# EAGLE board BluetoothMate-Panel v16a (EAGLE 6.5.0), part 1 of 2
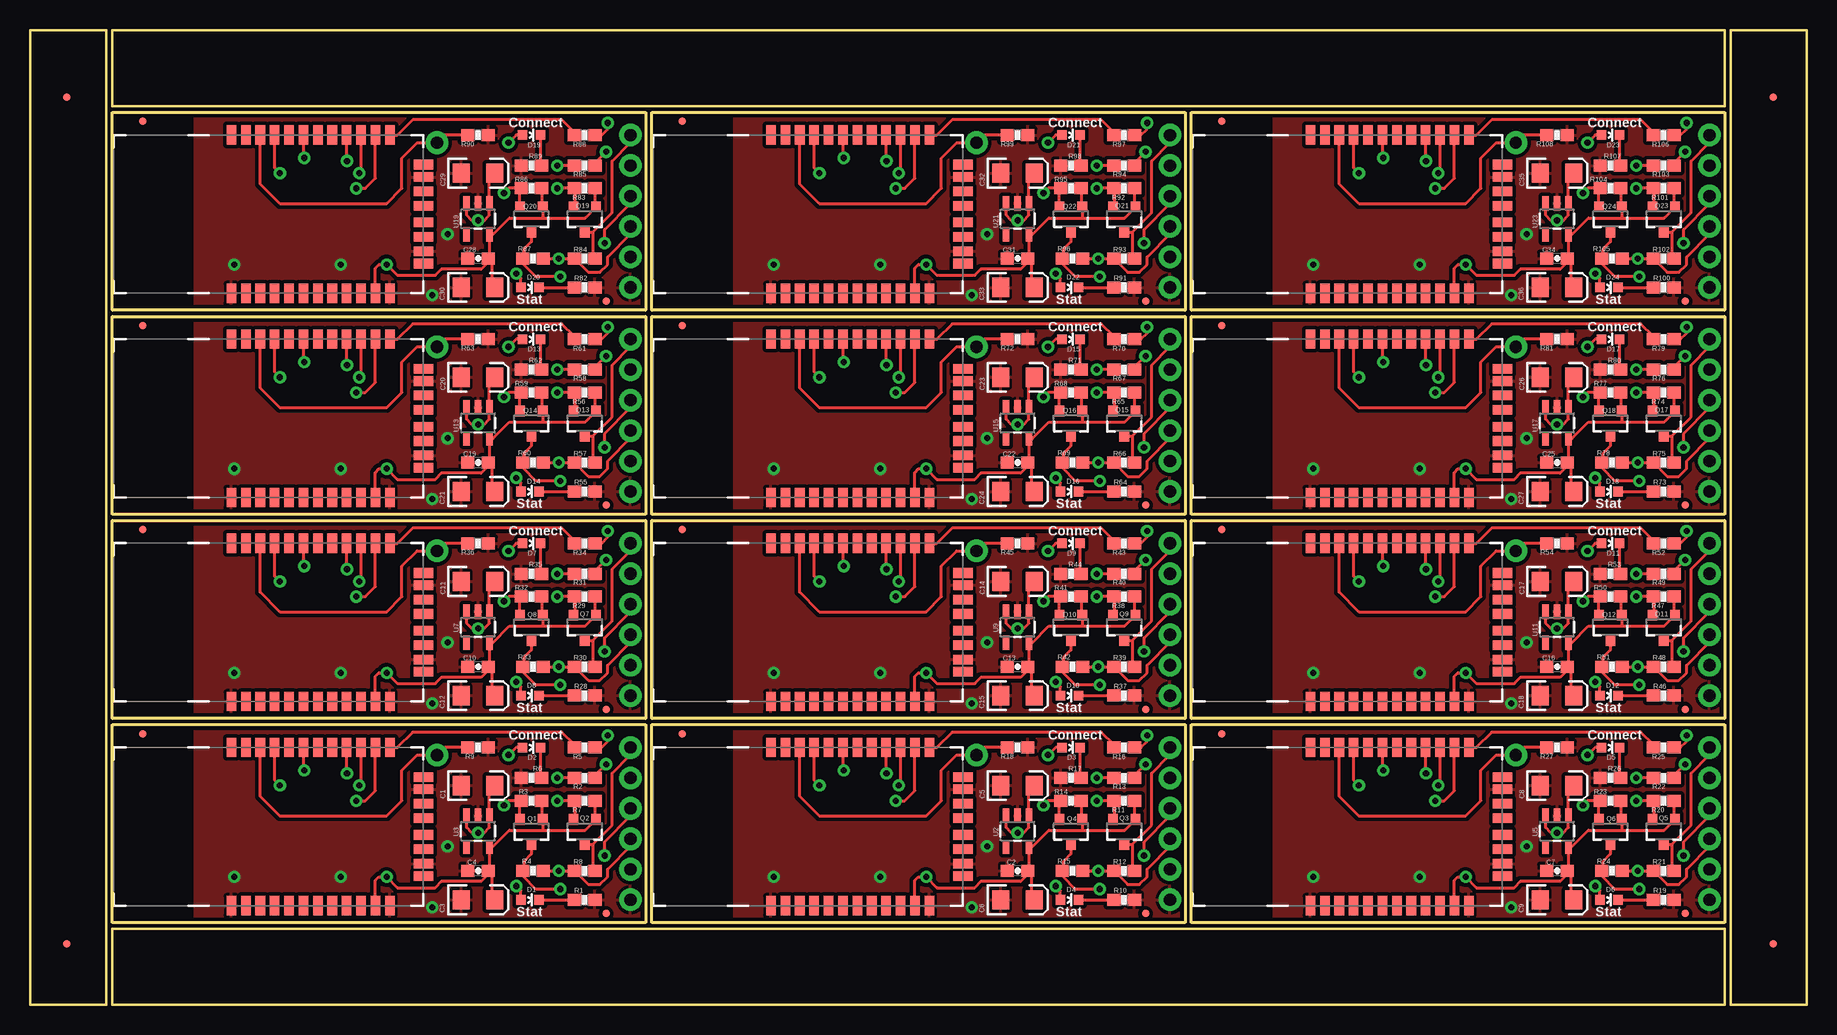
[diagram p0: board, top side]
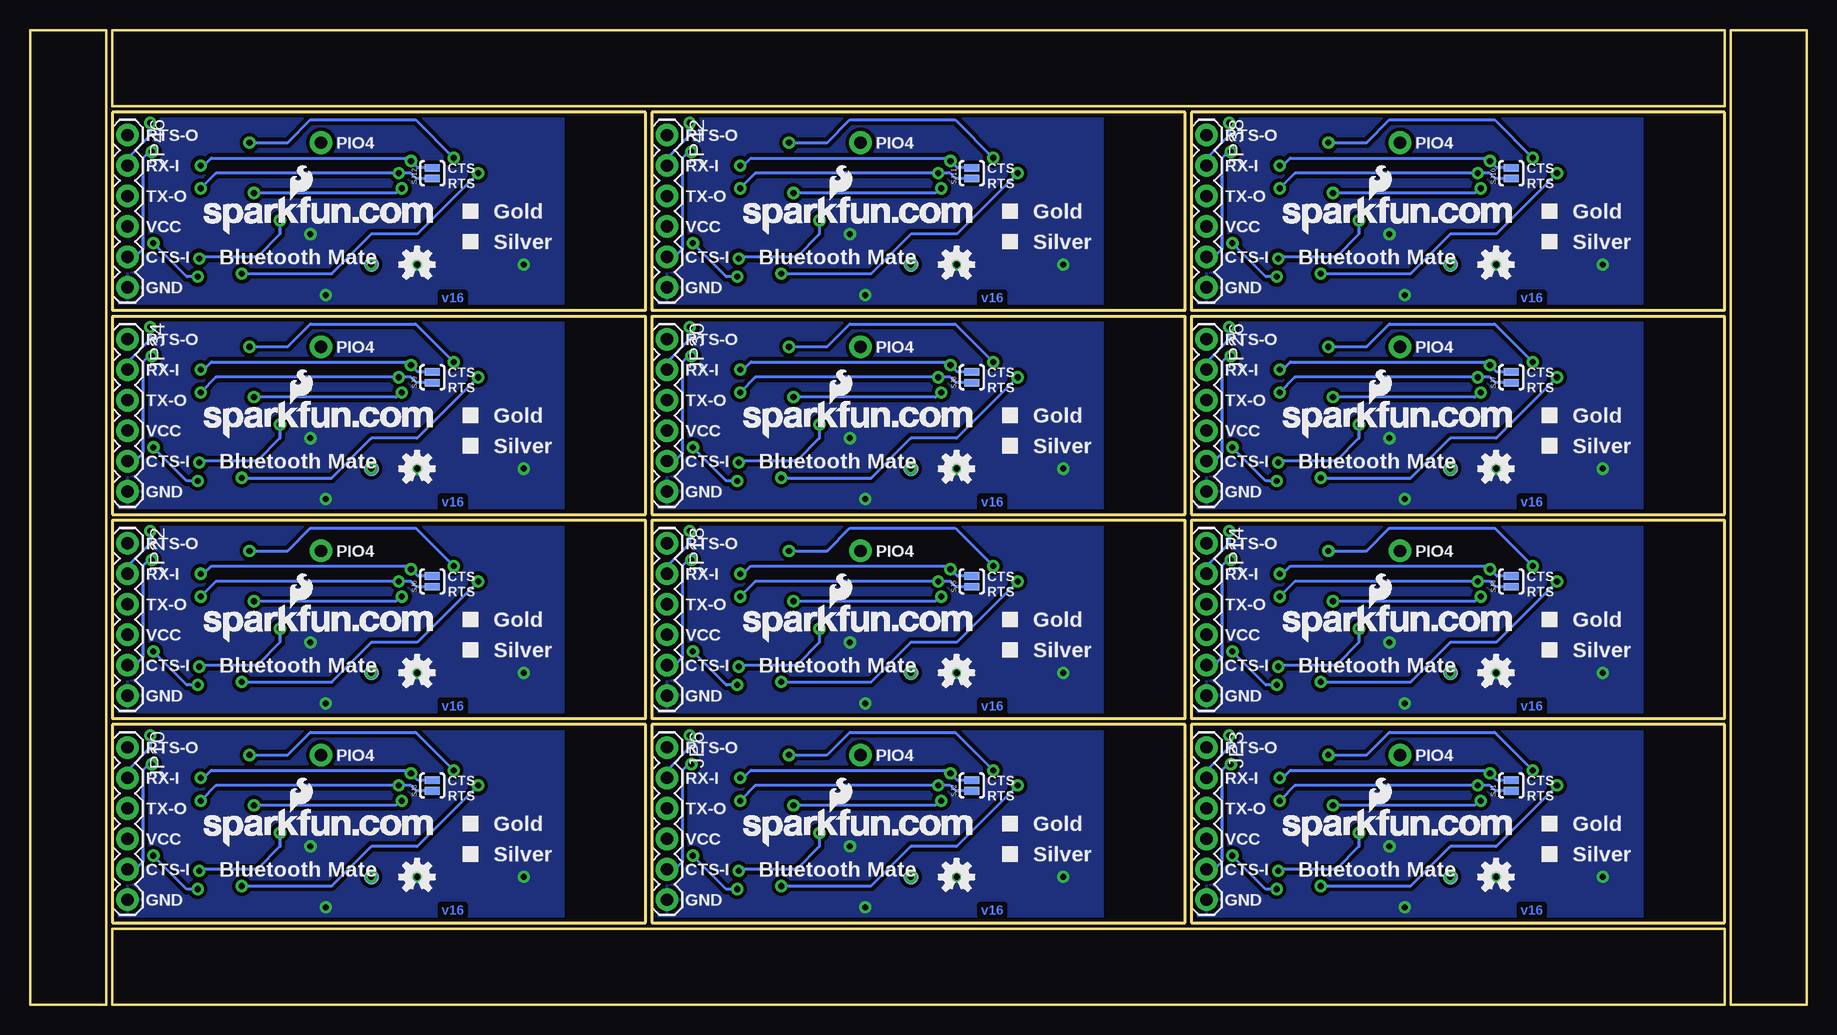
[diagram p1: board, bottom side, seen from below]

Size 148.08 x 81.28 mm. Coordinates in mm from the lower left corner, seen from the top.
Outline: 6.86,6.86 6.86,23.37 51.31,23.37 51.31,6.86 6.86,6.86
Outline: 141.22,6.35 6.86,6.35 6.86,0 141.22,0 141.22,6.35
Outline: 51.82,6.86 51.82,23.37 96.27,23.37 96.27,6.86 51.82,6.86
Outline: 96.77,6.86 96.77,23.37 141.22,23.37 141.22,6.86 96.77,6.86
Outline: 6.86,23.88 6.86,40.39 51.31,40.39 51.31,23.88 6.86,23.88
Outline: 51.82,23.88 51.82,40.39 96.27,40.39 96.27,23.88 51.82,23.88
Outline: 96.77,23.88 96.77,40.39 141.22,40.39 141.22,23.88 96.77,23.88
Outline: 6.86,40.89 6.86,57.4 51.31,57.4 51.31,40.89 6.86,40.89
Outline: 51.82,40.89 51.82,57.4 96.27,57.4 96.27,40.89 51.82,40.89
Outline: 96.77,40.89 96.77,57.4 141.22,57.4 141.22,40.89 96.77,40.89
Outline: 6.86,57.91 6.86,74.42 51.31,74.42 51.31,57.91 6.86,57.91
Outline: 51.82,57.91 51.82,74.42 96.27,74.42 96.27,57.91 51.82,57.91
Outline: 96.77,57.91 96.77,74.42 141.22,74.42 141.22,57.91 96.77,57.91
Outline: 141.22,81.28 6.86,81.28 6.86,74.93 141.22,74.93 141.22,81.28
Outline: 6.35,0 6.35,81.28 0,81.28 0,0 6.35,0
Outline: 148.08,0 148.08,81.28 141.73,81.28 141.73,0 148.08,0
Copper layers (1*16): Top 0.035mm / dielectric 1.5mm / Bottom 0.035mm
Design rules "SparkFun *": minimum track width 8mil, minimum drill 20mil, track to track 8mil, track to pad 8mil, pad to pad 8mil, via to via 8mil, smd to smd 8mil, copper to edge 9mil, drill to drill 8mil, minimum pad ring 12mil, minimum via ring 10mil, stop-mask expansion 4mil, vias tented up to drill 20mil, thermal gap 10mil

## Footprints (pad centres in the part's own frame; a part is rotated, then mirrored left to right if it is on the bottom)
EIA3216 = smd 1.4 x 1.6: A 1.4,0; C -1.4,0
0603-CAP = smd 1.1 x 1: 1 -0.85,0; 2 0.85,0
LED-0603 = smd 0.8 x 0.8: A 0,-0.75; C 0,0.75
MICRO-FIDUCIAL = smd 0.635 x 0.635: 1 0,0
FIDUCIAL-1X2.5 = smd 0.635 x 0.635: 1 0,0
1X01NS = drill 1.016 pad 1.88: 1 0,0
1X06 = drill 1.016 pad 1.88: 1 0,0; 2 2.54,0; 3 5.08,0; 4 7.62,0; 5 10.16,0; 6 12.7,0
SOT23-3 = smd 0.8 x 0.9: 1 -0.95,-1; 2 0.95,-1; 3 0,1.1
0603-RES = smd 1.1 x 1: 1 -0.85,0; 2 0.85,0
SJ_2S-NO = smd 0.635 x 1.27: 1 -0.45,0; 2 0.45,0
PAD.03X.05 = smd 1.27 x 1.27: P$1 0,0
RN41 = smd 0.8 x 1.6: 1 -6.6,-6.6; 2 -5.4,-6.6; 3 -4.2,-6.6; 4 -3,-6.6; 5 -1.8,-6.6; 6 -0.6,-6.6; 7 0.6,-6.6; 8 1.8,-6.6; 9 3,-6.6; 10 4.2,-6.6; 11 5.4,-6.6; 12 6.6,-6.6; 13 6.6,6.6; 14 5.4,6.6; 15 4.2,6.6; 16 3,6.6; 17 1.8,6.6; 18 0.6,6.6; 19 -0.6,6.6; 20 -1.8,6.6; 21 -3,6.6; 22 -4.2,6.6; 23 -5.4,6.6; 24 -6.6,6.6 | smd 1.6 x 0.8: 28 9.4,3.1; 29 9.4,-3.1; 30 9.4,4.122; 31 9.4,1.9; 32 9.4,0.7; 33 9.4,-0.7; 34 9.4,-1.9; 35 9.4,-4.122
SOT23-5 = smd 0.55 x 1.2: 1 -0.95,-1.3; 2 0,-1.3; 3 0.95,-1.3; 4 0.95,1.3; 5 -0.95,1.3

## Placement (x,y rotation side)
C1  10uF  [EIA3216]  37.34,18.29 0 top
C2  1uF  [0603-CAP]  82.3,11.18 180 top
C3  10uF  [EIA3216]  37.34,8.76 0 top
C4  1uF  [0603-CAP]  37.34,11.18 180 top
C5  10uF  [EIA3216]  82.3,18.29 0 top
C6  10uF  [EIA3216]  82.3,8.76 0 top
C7  1uF  [0603-CAP]  127.25,11.18 180 top
C8  10uF  [EIA3216]  127.25,18.29 0 top
C9  10uF  [EIA3216]  127.25,8.76 0 top
C10  1uF  [0603-CAP]  37.34,28.19 180 top
C11  10uF  [EIA3216]  37.34,35.31 0 top
C12  10uF  [EIA3216]  37.34,25.78 0 top
C13  1uF  [0603-CAP]  82.3,28.19 180 top
C14  10uF  [EIA3216]  82.3,35.31 0 top
C15  10uF  [EIA3216]  82.3,25.78 0 top
C16  1uF  [0603-CAP]  127.25,28.19 180 top
C17  10uF  [EIA3216]  127.25,35.31 0 top
C18  10uF  [EIA3216]  127.25,25.78 0 top
C19  1uF  [0603-CAP]  37.34,45.21 180 top
C20  10uF  [EIA3216]  37.34,52.32 0 top
C21  10uF  [EIA3216]  37.34,42.8 0 top
C22  1uF  [0603-CAP]  82.3,45.21 180 top
C23  10uF  [EIA3216]  82.3,52.32 0 top
C24  10uF  [EIA3216]  82.3,42.8 0 top
C25  1uF  [0603-CAP]  127.25,45.21 180 top
C26  10uF  [EIA3216]  127.25,52.32 0 top
C27  10uF  [EIA3216]  127.25,42.8 0 top
C28  1uF  [0603-CAP]  37.34,62.23 180 top
C29  10uF  [EIA3216]  37.34,69.34 0 top
C30  10uF  [EIA3216]  37.34,59.82 0 top
C31  1uF  [0603-CAP]  82.3,62.23 180 top
C32  10uF  [EIA3216]  82.3,69.34 0 top
C33  10uF  [EIA3216]  82.3,59.82 0 top
C34  1uF  [0603-CAP]  127.25,62.23 180 top
C35  10uF  [EIA3216]  127.25,69.34 0 top
C36  10uF  [EIA3216]  127.25,59.82 0 top
D1  Red  [LED-0603]  41.66,8.76 270 top
D2  Green  [LED-0603]  41.78,21.46 270 top
D3  Green  [LED-0603]  86.74,21.46 270 top
D4  Red  [LED-0603]  86.61,8.76 270 top
D5  Green  [LED-0603]  131.7,21.46 270 top
D6  Red  [LED-0603]  131.57,8.76 270 top
D7  Green  [LED-0603]  41.78,38.48 270 top
D8  Red  [LED-0603]  41.66,25.78 270 top
D9  Green  [LED-0603]  86.74,38.48 270 top
D10  Red  [LED-0603]  86.61,25.78 270 top
D11  Green  [LED-0603]  131.7,38.48 270 top
D12  Red  [LED-0603]  131.57,25.78 270 top
D13  Green  [LED-0603]  41.78,55.5 270 top
D14  Red  [LED-0603]  41.66,42.8 270 top
D15  Green  [LED-0603]  86.74,55.5 270 top
D16  Red  [LED-0603]  86.61,42.8 270 top
D17  Green  [LED-0603]  131.7,55.5 270 top
D18  Red  [LED-0603]  131.57,42.8 270 top
D19  Green  [LED-0603]  41.78,72.52 270 top
D20  Red  [LED-0603]  41.66,59.82 270 top
D21  Green  [LED-0603]  86.74,72.52 270 top
D22  Red  [LED-0603]  86.61,59.82 270 top
D23  Green  [LED-0603]  131.7,72.52 270 top
D24  Red  [LED-0603]  131.57,59.82 270 top
E$1  [MICRO-FIDUCIAL]  145.29,5.08 0 top
E$2  [MICRO-FIDUCIAL]  3.05,75.69 0 top
E$3  [MICRO-FIDUCIAL]  3.05,5.08 0 top
E$4  [MICRO-FIDUCIAL]  145.29,75.69 0 top
JP1  FIDUCIAL1X2.5  [FIDUCIAL-1X2.5]  9.4,22.61 0 top
JP2  M01SMDNS  [1X01NS]  33.91,20.83 0 top
JP3  [1X06]  50.04,21.46 270 bottom
JP4  FIDUCIAL1X2.5  [FIDUCIAL-1X2.5]  48.01,7.62 0 top
JP5  M01SMDNS  [1X01NS]  78.87,20.83 0 top
JP6  [1X06]  95,21.46 270 bottom
JP7  FIDUCIAL1X2.5  [FIDUCIAL-1X2.5]  54.36,22.61 0 top
JP8  FIDUCIAL1X2.5  [FIDUCIAL-1X2.5]  92.96,7.62 0 top
JP9  M01SMDNS  [1X01NS]  123.83,20.83 0 top
JP10  [1X06]  139.95,21.46 270 bottom
JP11  FIDUCIAL1X2.5  [FIDUCIAL-1X2.5]  99.31,22.61 0 top
JP12  FIDUCIAL1X2.5  [FIDUCIAL-1X2.5]  137.92,7.62 0 top
JP13  M01SMDNS  [1X01NS]  33.91,37.85 0 top
JP14  [1X06]  50.04,38.48 270 bottom
JP15  FIDUCIAL1X2.5  [FIDUCIAL-1X2.5]  9.4,39.62 0 top
JP16  FIDUCIAL1X2.5  [FIDUCIAL-1X2.5]  48.01,24.64 0 top
JP17  M01SMDNS  [1X01NS]  78.87,37.85 0 top
JP18  [1X06]  95,38.48 270 bottom
JP19  FIDUCIAL1X2.5  [FIDUCIAL-1X2.5]  54.36,39.62 0 top
JP20  FIDUCIAL1X2.5  [FIDUCIAL-1X2.5]  92.96,24.64 0 top
JP21  M01SMDNS  [1X01NS]  123.83,37.85 0 top
JP22  [1X06]  139.95,38.48 270 bottom
JP23  FIDUCIAL1X2.5  [FIDUCIAL-1X2.5]  99.31,39.62 0 top
JP24  FIDUCIAL1X2.5  [FIDUCIAL-1X2.5]  137.92,24.64 0 top
JP25  M01SMDNS  [1X01NS]  33.91,54.86 0 top
JP26  [1X06]  50.04,55.5 270 bottom
JP27  FIDUCIAL1X2.5  [FIDUCIAL-1X2.5]  9.4,56.64 0 top
JP28  FIDUCIAL1X2.5  [FIDUCIAL-1X2.5]  48.01,41.66 0 top
JP29  M01SMDNS  [1X01NS]  78.87,54.86 0 top
JP30  [1X06]  95,55.5 270 bottom
JP31  FIDUCIAL1X2.5  [FIDUCIAL-1X2.5]  54.36,56.64 0 top
JP32  FIDUCIAL1X2.5  [FIDUCIAL-1X2.5]  92.96,41.66 0 top
JP33  M01SMDNS  [1X01NS]  123.83,54.86 0 top
JP34  [1X06]  139.95,55.5 270 bottom
JP35  FIDUCIAL1X2.5  [FIDUCIAL-1X2.5]  99.31,56.64 0 top
JP36  FIDUCIAL1X2.5  [FIDUCIAL-1X2.5]  137.92,41.66 0 top
JP37  M01SMDNS  [1X01NS]  33.91,71.88 0 top
JP38  [1X06]  50.04,72.52 270 bottom
JP39  FIDUCIAL1X2.5  [FIDUCIAL-1X2.5]  9.4,73.66 0 top
JP40  FIDUCIAL1X2.5  [FIDUCIAL-1X2.5]  48.01,58.67 0 top
JP41  M01SMDNS  [1X01NS]  78.87,71.88 0 top
JP42  [1X06]  95,72.52 270 bottom
JP43  FIDUCIAL1X2.5  [FIDUCIAL-1X2.5]  54.36,73.66 0 top
JP44  FIDUCIAL1X2.5  [FIDUCIAL-1X2.5]  92.96,58.67 0 top
JP45  M01SMDNS  [1X01NS]  123.83,71.88 0 top
JP46  [1X06]  139.95,72.52 270 bottom
JP47  FIDUCIAL1X2.5  [FIDUCIAL-1X2.5]  99.31,73.66 0 top
JP48  FIDUCIAL1X2.5  [FIDUCIAL-1X2.5]  137.92,58.67 0 top
LOGO1  OSHW-LOGOS  [OSHW-LOGO-S]  25.91,10.67 0 bottom
LOGO2  OSHW-LOGOS  [OSHW-LOGO-S]  70.87,10.67 0 bottom
LOGO3  OSHW-LOGOS  [OSHW-LOGO-S]  115.82,10.67 0 bottom
LOGO4  OSHW-LOGOS  [OSHW-LOGO-S]  25.91,27.69 0 bottom
LOGO5  OSHW-LOGOS  [OSHW-LOGO-S]  70.87,27.69 0 bottom
LOGO6  OSHW-LOGOS  [OSHW-LOGO-S]  115.82,27.69 0 bottom
LOGO7  OSHW-LOGOS  [OSHW-LOGO-S]  25.91,44.7 0 bottom
LOGO8  OSHW-LOGOS  [OSHW-LOGO-S]  70.87,44.7 0 bottom
LOGO9  OSHW-LOGOS  [OSHW-LOGO-S]  115.82,44.7 0 bottom
LOGO10  OSHW-LOGOS  [OSHW-LOGO-S]  25.91,61.72 0 bottom
LOGO11  OSHW-LOGOS  [OSHW-LOGO-S]  70.87,61.72 0 bottom
LOGO12  OSHW-LOGOS  [OSHW-LOGO-S]  115.82,61.72 0 bottom
Q1  MOSFET-NCHANNELSMD  [SOT23-3]  41.78,14.48 180 top
Q2  MOSFET-NCHANNELSMD  [SOT23-3]  46.23,14.48 180 top
Q3  MOSFET-NCHANNELSMD  [SOT23-3]  91.19,14.48 180 top
Q4  MOSFET-NCHANNELSMD  [SOT23-3]  86.74,14.48 180 top
Q5  MOSFET-NCHANNELSMD  [SOT23-3]  136.14,14.48 180 top
Q6  MOSFET-NCHANNELSMD  [SOT23-3]  131.7,14.48 180 top
Q7  MOSFET-NCHANNELSMD  [SOT23-3]  46.23,31.5 180 top
Q8  MOSFET-NCHANNELSMD  [SOT23-3]  41.78,31.5 180 top
Q9  MOSFET-NCHANNELSMD  [SOT23-3]  91.19,31.5 180 top
Q10  MOSFET-NCHANNELSMD  [SOT23-3]  86.74,31.5 180 top
Q11  MOSFET-NCHANNELSMD  [SOT23-3]  136.14,31.5 180 top
Q12  MOSFET-NCHANNELSMD  [SOT23-3]  131.7,31.5 180 top
Q13  MOSFET-NCHANNELSMD  [SOT23-3]  46.23,48.51 180 top
Q14  MOSFET-NCHANNELSMD  [SOT23-3]  41.78,48.51 180 top
Q15  MOSFET-NCHANNELSMD  [SOT23-3]  91.19,48.51 180 top
Q16  MOSFET-NCHANNELSMD  [SOT23-3]  86.74,48.51 180 top
Q17  MOSFET-NCHANNELSMD  [SOT23-3]  136.14,48.51 180 top
Q18  MOSFET-NCHANNELSMD  [SOT23-3]  131.7,48.51 180 top
Q19  MOSFET-NCHANNELSMD  [SOT23-3]  46.23,65.53 180 top
Q20  MOSFET-NCHANNELSMD  [SOT23-3]  41.78,65.53 180 top
Q21  MOSFET-NCHANNELSMD  [SOT23-3]  91.19,65.53 180 top
Q22  MOSFET-NCHANNELSMD  [SOT23-3]  86.74,65.53 180 top
Q23  MOSFET-NCHANNELSMD  [SOT23-3]  136.14,65.53 180 top
Q24  MOSFET-NCHANNELSMD  [SOT23-3]  131.7,65.53 180 top
R1  330  [0603-RES]  46.23,8.76 0 top
R2  10K  [0603-RES]  46.23,18.92 0 top
R3  10K  [0603-RES]  41.78,17.02 180 top
R4  10K  [0603-RES]  41.91,11.18 180 top
R5  10K  [0603-RES]  46.23,21.46 0 top
R6  330  [0603-RES]  41.78,18.92 180 top
R7  10K  [0603-RES]  46.23,17.02 180 top
R8  10K  [0603-RES]  46.23,11.18 0 top
R9  10K  [0603-RES]  37.34,21.46 180 top
R10  330  [0603-RES]  91.19,8.76 0 top
R11  10K  [0603-RES]  91.19,17.02 180 top
R12  10K  [0603-RES]  91.19,11.18 0 top
R13  10K  [0603-RES]  91.19,18.92 0 top
R14  10K  [0603-RES]  86.74,17.02 180 top
R15  10K  [0603-RES]  86.87,11.18 180 top
R16  10K  [0603-RES]  91.19,21.46 0 top
R17  330  [0603-RES]  86.74,18.92 180 top
R18  10K  [0603-RES]  82.3,21.46 180 top
R19  330  [0603-RES]  136.14,8.76 0 top
R20  10K  [0603-RES]  136.14,17.02 180 top
R21  10K  [0603-RES]  136.14,11.18 0 top
R22  10K  [0603-RES]  136.14,18.92 0 top
R23  10K  [0603-RES]  131.7,17.02 180 top
R24  10K  [0603-RES]  131.83,11.18 180 top
R25  10K  [0603-RES]  136.14,21.46 0 top
R26  330  [0603-RES]  131.7,18.92 180 top
R27  10K  [0603-RES]  127.25,21.46 180 top
R28  330  [0603-RES]  46.23,25.78 0 top
R29  10K  [0603-RES]  46.23,34.04 180 top
R30  10K  [0603-RES]  46.23,28.19 0 top
R31  10K  [0603-RES]  46.23,35.94 0 top
R32  10K  [0603-RES]  41.78,34.04 180 top
R33  10K  [0603-RES]  41.91,28.19 180 top
R34  10K  [0603-RES]  46.23,38.48 0 top
R35  330  [0603-RES]  41.78,35.94 180 top
R36  10K  [0603-RES]  37.34,38.48 180 top
R37  330  [0603-RES]  91.19,25.78 0 top
R38  10K  [0603-RES]  91.19,34.04 180 top
R39  10K  [0603-RES]  91.19,28.19 0 top
R40  10K  [0603-RES]  91.19,35.94 0 top
R41  10K  [0603-RES]  86.74,34.04 180 top
R42  10K  [0603-RES]  86.87,28.19 180 top
R43  10K  [0603-RES]  91.19,38.48 0 top
R44  330  [0603-RES]  86.74,35.94 180 top
R45  10K  [0603-RES]  82.3,38.48 180 top
R46  330  [0603-RES]  136.14,25.78 0 top
R47  10K  [0603-RES]  136.14,34.04 180 top
R48  10K  [0603-RES]  136.14,28.19 0 top
R49  10K  [0603-RES]  136.14,35.94 0 top
R50  10K  [0603-RES]  131.7,34.04 180 top
R51  10K  [0603-RES]  131.83,28.19 180 top
R52  10K  [0603-RES]  136.14,38.48 0 top
R53  330  [0603-RES]  131.7,35.94 180 top
R54  10K  [0603-RES]  127.25,38.48 180 top
R55  330  [0603-RES]  46.23,42.8 0 top
R56  10K  [0603-RES]  46.23,51.05 180 top
R57  10K  [0603-RES]  46.23,45.21 0 top
R58  10K  [0603-RES]  46.23,52.96 0 top
R59  10K  [0603-RES]  41.78,51.05 180 top
R60  10K  [0603-RES]  41.91,45.21 180 top
R61  10K  [0603-RES]  46.23,55.5 0 top
R62  330  [0603-RES]  41.78,52.96 180 top
R63  10K  [0603-RES]  37.34,55.5 180 top
R64  330  [0603-RES]  91.19,42.8 0 top
R65  10K  [0603-RES]  91.19,51.05 180 top
R66  10K  [0603-RES]  91.19,45.21 0 top
R67  10K  [0603-RES]  91.19,52.96 0 top
R68  10K  [0603-RES]  86.74,51.05 180 top
R69  10K  [0603-RES]  86.87,45.21 180 top
R70  10K  [0603-RES]  91.19,55.5 0 top
R71  330  [0603-RES]  86.74,52.96 180 top
R72  10K  [0603-RES]  82.3,55.5 180 top
R73  330  [0603-RES]  136.14,42.8 0 top
R74  10K  [0603-RES]  136.14,51.05 180 top
R75  10K  [0603-RES]  136.14,45.21 0 top
R76  10K  [0603-RES]  136.14,52.96 0 top
R77  10K  [0603-RES]  131.7,51.05 180 top
R78  10K  [0603-RES]  131.83,45.21 180 top
R79  10K  [0603-RES]  136.14,55.5 0 top
R80  330  [0603-RES]  131.7,52.96 180 top
R81  10K  [0603-RES]  127.25,55.5 180 top
R82  330  [0603-RES]  46.23,59.82 0 top
R83  10K  [0603-RES]  46.23,68.07 180 top
R84  10K  [0603-RES]  46.23,62.23 0 top
R85  10K  [0603-RES]  46.23,69.98 0 top
R86  10K  [0603-RES]  41.78,68.07 180 top
R87  10K  [0603-RES]  41.91,62.23 180 top
R88  10K  [0603-RES]  46.23,72.52 0 top
R89  330  [0603-RES]  41.78,69.98 180 top
R90  10K  [0603-RES]  37.34,72.52 180 top
R91  330  [0603-RES]  91.19,59.82 0 top
R92  10K  [0603-RES]  91.19,68.07 180 top
R93  10K  [0603-RES]  91.19,62.23 0 top
R94  10K  [0603-RES]  91.19,69.98 0 top
R95  10K  [0603-RES]  86.74,68.07 180 top
R96  10K  [0603-RES]  86.87,62.23 180 top
R97  10K  [0603-RES]  91.19,72.52 0 top
R98  330  [0603-RES]  86.74,69.98 180 top
R99  10K  [0603-RES]  82.3,72.52 180 top
R100  330  [0603-RES]  136.14,59.82 0 top
R101  10K  [0603-RES]  136.14,68.07 180 top
R102  10K  [0603-RES]  136.14,62.23 0 top
R103  10K  [0603-RES]  136.14,69.98 0 top
R104  10K  [0603-RES]  131.7,68.07 180 top
R105  10K  [0603-RES]  131.83,62.23 180 top
R106  10K  [0603-RES]  136.14,72.52 0 top
R107  330  [0603-RES]  131.7,69.98 180 top
R108  10K  [0603-RES]  127.25,72.52 180 top
SJ1  SOLDERJUMPERNO  [SJ_2S-NO]  24.64,18.29 90 bottom
SJ2  SOLDERJUMPERNO  [SJ_2S-NO]  69.6,18.29 90 bottom
SJ3  SOLDERJUMPERNO  [SJ_2S-NO]  114.55,18.29 90 bottom
SJ4  SOLDERJUMPERNO  [SJ_2S-NO]  24.64,35.31 90 bottom
SJ5  SOLDERJUMPERNO  [SJ_2S-NO]  69.6,35.31 90 bottom
SJ6  SOLDERJUMPERNO  [SJ_2S-NO]  114.55,35.31 90 bottom
SJ7  SOLDERJUMPERNO  [SJ_2S-NO]  24.64,52.32 90 bottom
SJ8  SOLDERJUMPERNO  [SJ_2S-NO]  69.6,52.32 90 bottom
SJ9  SOLDERJUMPERNO  [SJ_2S-NO]  114.55,52.32 90 bottom
SJ10  SOLDERJUMPERNO  [SJ_2S-NO]  24.64,69.34 90 bottom
SJ11  SOLDERJUMPERNO  [SJ_2S-NO]  69.6,69.34 90 bottom
SJ12  SOLDERJUMPERNO  [SJ_2S-NO]  114.55,69.34 90 bottom
TP1  [PAD.03X.05]  29.72,10.67 0 bottom
TP2  [PAD.03X.05]  74.68,10.67 0 bottom
TP3  [PAD.03X.05]  119.63,10.67 0 bottom
TP4  [PAD.03X.05]  29.72,27.69 0 bottom
TP5  [PAD.03X.05]  74.68,27.69 0 bottom
TP6  [PAD.03X.05]  119.63,27.69 0 bottom
TP7  [PAD.03X.05]  29.72,44.7 0 bottom
TP8  [PAD.03X.05]  74.68,44.7 0 bottom
TP9  [PAD.03X.05]  119.63,44.7 0 bottom
TP10  [PAD.03X.05]  29.72,61.72 0 bottom
TP11  [PAD.03X.05]  74.68,61.72 0 bottom
TP12  [PAD.03X.05]  119.63,61.72 0 bottom
U1  BLUETOOTH-RN41  [RN41]  23.38,14.87 0 top
U2  V_REG_LDOSMD  [SOT23-5]  82.3,14.48 180 top
U3  V_REG_LDOSMD  [SOT23-5]  37.34,14.48 180 top
U4  BLUETOOTH-RN41  [RN41]  68.34,14.87 0 top
U5  V_REG_LDOSMD  [SOT23-5]  127.25,14.48 180 top
U6  BLUETOOTH-RN41  [RN41]  113.3,14.87 0 top
U7  V_REG_LDOSMD  [SOT23-5]  37.34,31.5 180 top
U8  BLUETOOTH-RN41  [RN41]  23.38,31.89 0 top
U9  V_REG_LDOSMD  [SOT23-5]  82.3,31.5 180 top
U10  BLUETOOTH-RN41  [RN41]  68.34,31.89 0 top
U11  V_REG_LDOSMD  [SOT23-5]  127.25,31.5 180 top
U12  BLUETOOTH-RN41  [RN41]  113.3,31.89 0 top
U13  V_REG_LDOSMD  [SOT23-5]  37.34,48.51 180 top
U14  BLUETOOTH-RN41  [RN41]  23.38,48.91 0 top
U15  V_REG_LDOSMD  [SOT23-5]  82.3,48.51 180 top
U16  BLUETOOTH-RN41  [RN41]  68.34,48.91 0 top
U17  V_REG_LDOSMD  [SOT23-5]  127.25,48.51 180 top
U18  BLUETOOTH-RN41  [RN41]  113.3,48.91 0 top
U19  V_REG_LDOSMD  [SOT23-5]  37.34,65.53 180 top
U20  BLUETOOTH-RN41  [RN41]  23.38,65.93 0 top
U21  V_REG_LDOSMD  [SOT23-5]  82.3,65.53 180 top
U22  BLUETOOTH-RN41  [RN41]  68.34,65.93 0 top
U23  V_REG_LDOSMD  [SOT23-5]  127.25,65.53 180 top
U24  BLUETOOTH-RN41  [RN41]  113.3,65.93 0 top
U$1  LOGO-SFENEW  [SFE-NEW-WEBLOGO]  43.69,13.21 0 bottom
U$2  LOGO-SFENEW  [SFE-NEW-WEBLOGO]  88.65,13.21 0 bottom
U$3  LOGO-SFENEW  [SFE-NEW-WEBLOGO]  133.6,13.21 0 bottom
U$4  LOGO-SFENEW  [SFE-NEW-WEBLOGO]  43.69,30.23 0 bottom
U$5  LOGO-SFENEW  [SFE-NEW-WEBLOGO]  88.65,30.23 0 bottom
U$6  LOGO-SFENEW  [SFE-NEW-WEBLOGO]  133.6,30.23 0 bottom
U$7  LOGO-SFENEW  [SFE-NEW-WEBLOGO]  43.69,47.24 0 bottom
U$8  LOGO-SFENEW  [SFE-NEW-WEBLOGO]  88.65,47.24 0 bottom
U$9  LOGO-SFENEW  [SFE-NEW-WEBLOGO]  133.6,47.24 0 bottom
U$10  LOGO-SFENEW  [SFE-NEW-WEBLOGO]  43.69,64.26 0 bottom
U$11  LOGO-SFENEW  [SFE-NEW-WEBLOGO]  88.65,64.26 0 bottom
U$12  LOGO-SFENEW  [SFE-NEW-WEBLOGO]  133.6,64.26 0 bottom

## Library data of the parts
C1-C36 D1-D24 JP2 JP3 JP5 JP6 JP9 JP10 JP13 JP14 JP17 JP18 JP21 JP22 JP25 JP26 JP29 JP30 JP33 JP34 JP37 JP38 JP41 JP42 JP45 JP46 Q1-Q24 R1-R108 SJ1-SJ12 TP1-TP12 U2 U3 U5 U7 U9 U11 U13 U15 U17 U19 U21 U23 U$1-U$12 = SparkFun
E$1-E$4 LOGO1-LOGO12 = SparkFun-Aesthetics
JP1 JP4 JP7 JP8 JP11 JP12 JP15 JP16 JP19 JP20 JP23 JP24 JP27 JP28 JP31 JP32 JP35 JP36 JP39 JP40 JP43 JP44 JP47 JP48 = abes
U1 U4 U6 U8 U10 U12 U14 U16 U18 U20 U22 U24 = SparkFun-RF

## Nets
3.3V: C3.A C4.1 Q1.1 Q2.1 R3.1 R7.1 TP1.P$1 U1.11 U3.5
3.3V1: C2.1 C6.A Q3.1 Q4.1 R11.1 R14.1 TP2.P$1 U2.5 U4.11
3.3V2: C7.1 C9.A Q5.1 Q6.1 R20.1 R23.1 TP3.P$1 U5.5 U6.11
3.3V3: C10.1 C12.A Q7.1 Q8.1 R29.1 R32.1 TP4.P$1 U7.5 U8.11
3.3V4: C13.1 C15.A Q9.1 Q10.1 R38.1 R41.1 TP5.P$1 U9.5 U10.11
3.3V5: C16.1 C18.A Q11.1 Q12.1 R47.1 R50.1 TP6.P$1 U11.5 U12.11
3.3V6: C19.1 C21.A Q13.1 Q14.1 R56.1 R59.1 TP7.P$1 U13.5 U14.11
3.3V7: C22.1 C24.A Q15.1 Q16.1 R65.1 R68.1 TP8.P$1 U15.5 U16.11
3.3V8: C25.1 C27.A Q17.1 Q18.1 R74.1 R77.1 TP9.P$1 U17.5 U18.11
3.3V9: C28.1 C30.A Q19.1 Q20.1 R83.1 R86.1 TP10.P$1 U19.5 U20.11
3.3V10: C31.1 C33.A Q21.1 Q22.1 R92.1 R95.1 TP11.P$1 U21.5 U22.11
3.3V11: C34.1 C36.A Q23.1 Q24.1 R101.1 R104.1 TP12.P$1 U23.5 U24.11
CTS: R2.1 SJ1.2 U1.16
CTS1: R13.1 SJ2.2 U4.16
CTS2: R22.1 SJ3.2 U6.16
CTS3: R31.1 SJ4.2 U8.16
CTS4: R40.1 SJ5.2 U10.16
CTS5: R49.1 SJ6.2 U12.16
CTS6: R58.1 SJ7.2 U14.16
CTS7: R67.1 SJ8.2 U16.16
CTS8: R76.1 SJ9.2 U18.16
CTS9: R85.1 SJ10.2 U20.16
CTS10: R94.1 SJ11.2 U22.16
CTS11: R103.1 SJ12.2 U24.16
CTS_5V: JP3.5 R2.2
CTS_5V1: JP6.5 R13.2
CTS_5V2: JP10.5 R22.2
CTS_5V3: JP14.5 R31.2
CTS_5V4: JP18.5 R40.2
CTS_5V5: JP22.5 R49.2
CTS_5V6: JP26.5 R58.2
CTS_5V7: JP30.5 R67.2
CTS_5V8: JP34.5 R76.2
CTS_5V9: JP38.5 R85.2
CTS_5V10: JP42.5 R94.2
CTS_5V11: JP46.5 R103.2
D1: D1.C R1.1
D2: D2.C R6.1
D3: D4.C R10.1
D4: D3.C R17.1
D5: D6.C R19.1
D6: D5.C R26.1
D7: D8.C R28.1
D8: D7.C R35.1
D9: D10.C R37.1
D10: D9.C R44.1
D11: D12.C R46.1
D12: D11.C R53.1
D13: D14.C R55.1
D14: D13.C R62.1
D15: D16.C R64.1
D16: D15.C R71.1
D17: D18.C R73.1
D18: D17.C R80.1
D19: D20.C R82.1
D20: D19.C R89.1
D21: D22.C R91.1
D22: D21.C R98.1
D23: D24.C R100.1
D24: D23.C R107.1
GND: C1.C C3.C C4.2 JP3.6 R1.2 R6.2 R9.1 U1.1 U1.12 U1.28 U1.29 U3.2
GND1: C2.2 C5.C C6.C JP6.6 R10.2 R17.2 R18.1 U2.2 U4.1 U4.12 U4.28 U4.29
GND2: C7.2 C8.C C9.C JP10.6 R19.2 R26.2 R27.1 U5.2 U6.1 U6.12 U6.28 U6.29
GND3: C10.2 C11.C C12.C JP14.6 R28.2 R35.2 R36.1 U7.2 U8.1 U8.12 U8.28 U8.29
GND4: C13.2 C14.C C15.C JP18.6 R37.2 R44.2 R45.1 U9.2 U10.1 U10.12 U10.28 U10.29
GND5: C16.2 C17.C C18.C JP22.6 R46.2 R53.2 R54.1 U11.2 U12.1 U12.12 U12.28 U12.29
GND6: C19.2 C20.C C21.C JP26.6 R55.2 R62.2 R63.1 U13.2 U14.1 U14.12 U14.28 U14.29
GND7: C22.2 C23.C C24.C JP30.6 R64.2 R71.2 R72.1 U15.2 U16.1 U16.12 U16.28 U16.29
GND8: C25.2 C26.C C27.C JP34.6 R73.2 R80.2 R81.1 U17.2 U18.1 U18.12 U18.28 U18.29
GND9: C28.2 C29.C C30.C JP38.6 R82.2 R89.2 R90.1 U19.2 U20.1 U20.12 U20.28 U20.29
GND10: C31.2 C32.C C33.C JP42.6 R91.2 R98.2 R99.1 U21.2 U22.1 U22.12 U22.28 U22.29
GND11: C34.2 C35.C C36.C JP46.6 R100.2 R107.2 R108.1 U23.2 U24.1 U24.12 U24.28 U24.29
N$1: D1.A U1.21
N$2: D2.A U1.19
N$3: D4.A U4.21
N$4: D3.A U4.19
N$5: D6.A U6.21
N$6: D5.A U6.19
N$7: D8.A U8.21
N$8: D7.A U8.19
N$9: D10.A U10.21
N$10: D9.A U10.19
N$11: D12.A U12.21
N$12: D11.A U12.19
N$13: D14.A U14.21
N$14: D13.A U14.19
N$15: D16.A U16.21
N$16: D15.A U16.19
N$17: D18.A U18.21
N$18: D17.A U18.19
N$19: D20.A U20.21
N$20: D19.A U20.19
N$21: D22.A U22.21
N$22: D21.A U22.19
N$23: D24.A U24.21
N$24: D23.A U24.19
PIO1: JP5.1 R18.2 U4.22
PIO2: JP9.1 R27.2 U6.22
PIO3: JP13.1 R36.2 U8.22
PIO4: JP2.1 R9.2 U1.22
PIO5: JP17.1 R45.2 U10.22
PIO6: JP21.1 R54.2 U12.22
PIO7: JP25.1 R63.2 U14.22
PIO8: JP29.1 R72.2 U16.22
PIO9: JP33.1 R81.2 U18.22
PIO10: JP37.1 R90.2 U20.22
PIO11: JP41.1 R99.2 U22.22
PIO12: JP45.1 R108.2 U24.22
RTS: Q2.2 R7.2 SJ1.1 U1.15
RTS1: Q3.2 R11.2 SJ2.1 U4.15
RTS2: Q5.2 R20.2 SJ3.1 U6.15
RTS3: Q7.2 R29.2 SJ4.1 U8.15
RTS4: Q9.2 R38.2 SJ5.1 U10.15
RTS5: Q11.2 R47.2 SJ6.1 U12.15
RTS6: Q13.2 R56.2 SJ7.1 U14.15
RTS7: Q15.2 R65.2 SJ8.1 U16.15
RTS8: Q17.2 R74.2 SJ9.1 U18.15
RTS9: Q19.2 R83.2 SJ10.1 U20.15
RTS10: Q21.2 R92.2 SJ11.1 U22.15
RTS11: Q23.2 R101.2 SJ12.1 U24.15
RTS_5V: JP3.1 Q2.3 R8.2
RTS_5V1: JP6.1 Q3.3 R12.2
RTS_5V2: JP10.1 Q5.3 R21.2
RTS_5V3: JP14.1 Q7.3 R30.2
RTS_5V4: JP18.1 Q9.3 R39.2
RTS_5V5: JP22.1 Q11.3 R48.2
RTS_5V6: JP26.1 Q13.3 R57.2
RTS_5V7: JP30.1 Q15.3 R66.2
RTS_5V8: JP34.1 Q17.3 R75.2
RTS_5V9: JP38.1 Q19.3 R84.2
RTS_5V10: JP42.1 Q21.3 R93.2
RTS_5V11: JP46.1 Q23.3 R102.2
RX: R5.1 U1.13
RX1: R16.1 U4.13
RX2: R25.1 U6.13
RX3: R34.1 U8.13
RX4: R43.1 U10.13
RX5: R52.1 U12.13
RX6: R61.1 U14.13
RX7: R70.1 U16.13
RX8: R79.1 U18.13
RX9: R88.1 U20.13
RX10: R97.1 U22.13
RX11: R106.1 U24.13
RX_5V: JP3.2 R5.2
RX_5V1: JP6.2 R16.2
RX_5V2: JP10.2 R25.2
RX_5V3: JP14.2 R34.2
RX_5V4: JP18.2 R43.2
RX_5V5: JP22.2 R52.2
RX_5V6: JP26.2 R61.2
RX_5V7: JP30.2 R70.2
RX_5V8: JP34.2 R79.2
RX_5V9: JP38.2 R88.2
RX_5V10: JP42.2 R97.2
RX_5V11: JP46.2 R106.2
TX: Q1.2 R3.2 U1.14
TX1: Q4.2 R14.2 U4.14
TX2: Q6.2 R23.2 U6.14
TX3: Q8.2 R32.2 U8.14
TX4: Q10.2 R41.2 U10.14
TX5: Q12.2 R50.2 U12.14
TX6: Q14.2 R59.2 U14.14
TX7: Q16.2 R68.2 U16.14
TX8: Q18.2 R77.2 U18.14
TX9: Q20.2 R86.2 U20.14
TX10: Q22.2 R95.2 U22.14
TX11: Q24.2 R104.2 U24.14
TX_5V: JP3.3 Q1.3 R4.2
TX_5V1: JP6.3 Q4.3 R15.2
TX_5V2: JP10.3 Q6.3 R24.2
TX_5V3: JP14.3 Q8.3 R33.2
TX_5V4: JP18.3 Q10.3 R42.2
TX_5V5: JP22.3 Q12.3 R51.2
TX_5V6: JP26.3 Q14.3 R60.2
TX_5V7: JP30.3 Q16.3 R69.2
TX_5V8: JP34.3 Q18.3 R78.2
TX_5V9: JP38.3 Q20.3 R87.2
TX_5V10: JP42.3 Q22.3 R96.2
TX_5V11: JP46.3 Q24.3 R105.2
VCC: C1.A JP3.4 R4.1 R8.1 U3.1 U3.3
VCC1: C5.A JP6.4 R12.1 R15.1 U2.1 U2.3
VCC2: C8.A JP10.4 R21.1 R24.1 U5.1 U5.3
VCC3: C11.A JP14.4 R30.1 R33.1 U7.1 U7.3
VCC4: C14.A JP18.4 R39.1 R42.1 U9.1 U9.3
VCC5: C17.A JP22.4 R48.1 R51.1 U11.1 U11.3
VCC6: C20.A JP26.4 R57.1 R60.1 U13.1 U13.3
VCC7: C23.A JP30.4 R66.1 R69.1 U15.1 U15.3
VCC8: C26.A JP34.4 R75.1 R78.1 U17.1 U17.3
VCC9: C29.A JP38.4 R84.1 R87.1 U19.1 U19.3
VCC10: C32.A JP42.4 R93.1 R96.1 U21.1 U21.3
VCC11: C35.A JP46.4 R102.1 R105.1 U23.1 U23.3